# Altium PCB soldering_analog.PcbDoc
Units mm, origin at the board's own origin, x right, y up, seen from the top; angles counter-clockwise.
Board outline 80.5 x 20 mm, 2 copper layers (Top Layer, Bottom Layer), stack 1.571 mm thick; 36 components, 23 nets, 91 pads, 0 vias.
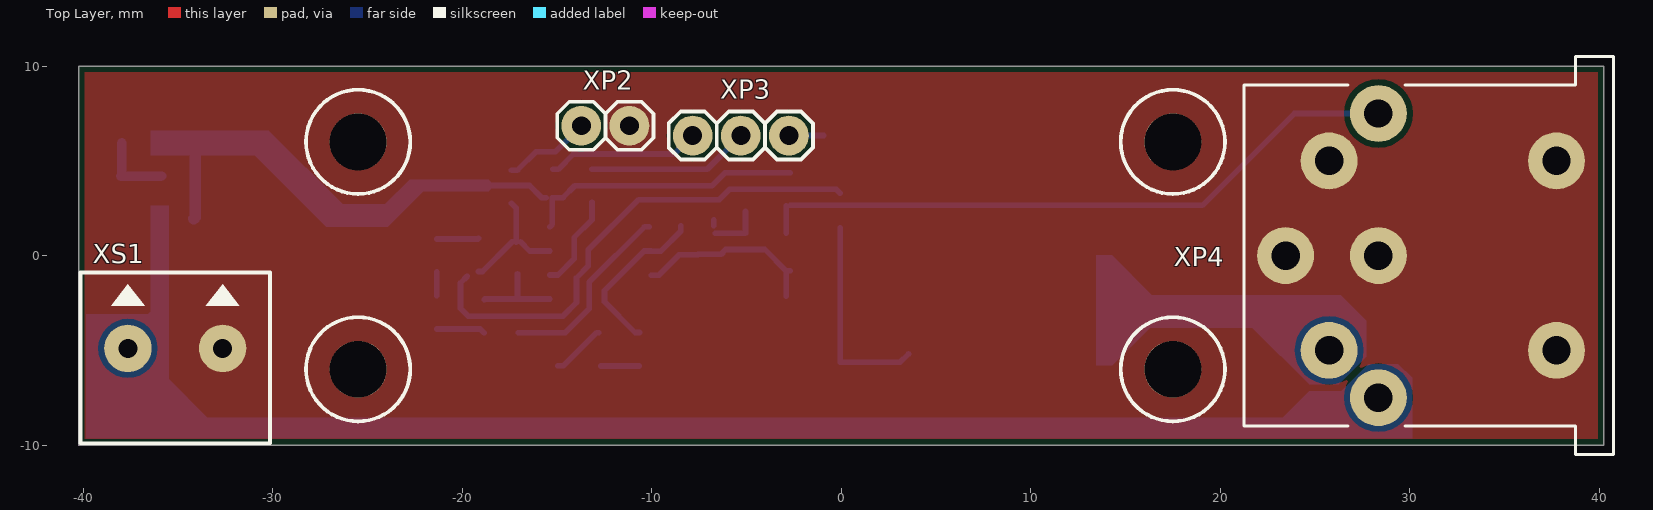
[diagram p0: Top Layer view]
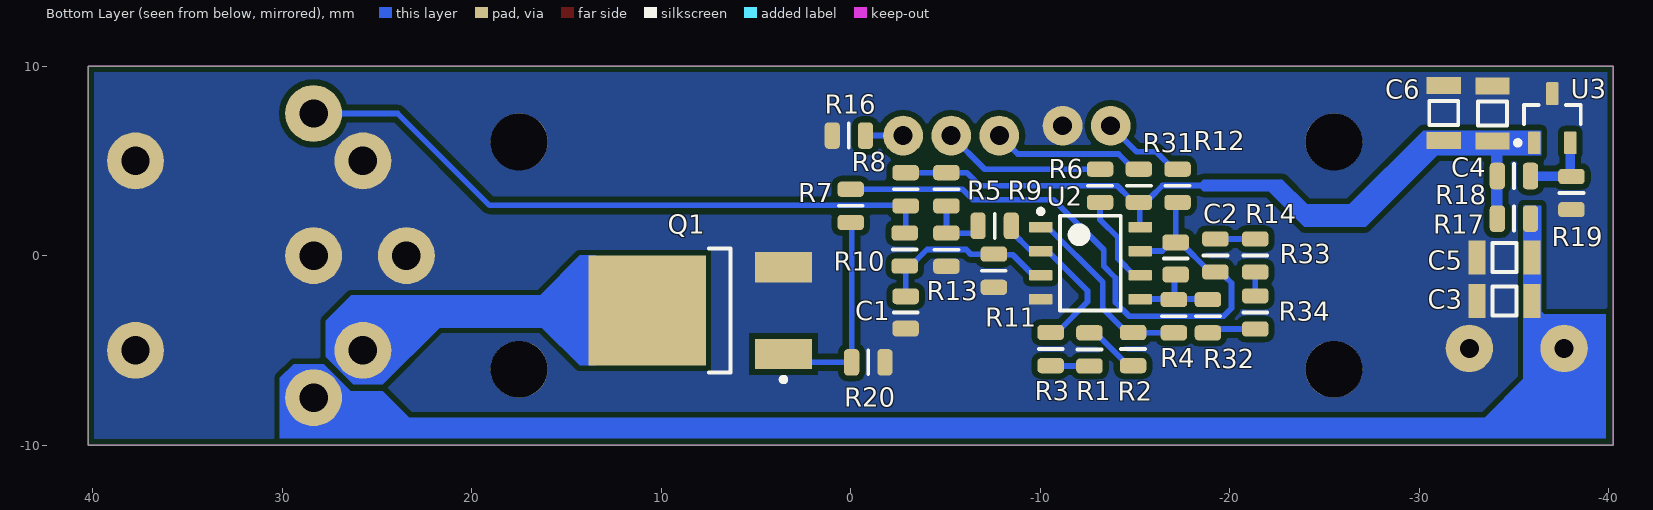
[diagram p1: Bottom Layer view, seen from below]

## Layer stack, top to bottom
Top Solder: solder mask 0.0102, Solder Resist, Dk 3.5
Top Layer: signal copper 0.0356
Dielectric 1: dielectric 1.5, FR-4, Dk 4.8
Bottom Layer: signal copper 0.0356
Bottom Solder: solder mask 0.0102, Solder Resist, Dk 3.5

## Board outline
-40.25,-10 40.25,-10 40.25,10 -40.25,10

## Design rules (kind name [scope] priority, off if disabled: settings)
Clearance Clearance_1 [IsRegion] p1: gap=0.3 ignorepadtopadclearanceinfootprint=FALSE
Clearance [All] p2: gap=0.25 ignorepadtopadclearanceinfootprint=FALSE
HoleSize [All] p1: absolutevalues=TRUE maxlimit=3 minlimit=0.2 maxpercent=80.000 minpercent=20.000
MinimumSolderMaskSliver [All] p1: minsoldermaskwidth=0.2
PolygonConnect PolygonConnect_1 [IsVia] p1: connectstyle=Direct reliefconductorwidth=0.254 reliefentries=4 polygonreliefangle="90 Angle" airgapwidth=0.254
PolygonConnect [All] p2: connectstyle=Direct reliefconductorwidth=0.35 reliefentries=4 polygonreliefangle="90 Angle" airgapwidth=0.25
RoutingVias [All] p1: holewidth=0.711 width=1.27 viastyle="Through Hole" minholewidth=0.711 minwidth=1.27 maxholewidth=0.711 maxwidth=1.27
SilkToSilkClearance [All] p1: silktosilkclearance=0.1
SilkToSolderMaskClearance [IsPad] p1: minsilkscreentomaskgap=0.2 clearancetoexposedcopper=TRUE
SolderMaskExpansion [All] p1: expansion=0.102
Width [All] p1: maxlimit=2 minlimit=0.3 preferedwidth=0.3
26 further rules are at their usual default settings.

## Components (designator, comment, footprint, x,y, rotation, side; value= is the part's Value field where it differs from the comment)
C1 "100nF" CAP0805R -2.9,-3 r90 bottom
C2 "100nF" CAP0805R -17.15,-0.15 r270 bottom
C3 "10uF" CAP1206R -34.5,-2.4 r180 bottom
C4 "10uF" CAP1206R -33.873,7.5 r270 bottom
C5 "10uF" CAP1206R -34.5,-0.1 r180 bottom
C6 "10uF" CAP1206R -31.3,7.529 r270 bottom
Q1 "STD24N06LT4G" ONSC-DPAK-3-369C-01_V 7.95,-2.9 r0 bottom
R1 "10k" RES0805R -12.6,-4.95 r270 bottom
R2 "10k" RES0805R -14.9,-4.936 r270 bottom
R3 "10k" RES0805R -10.553,-4.936 r270 bottom
R4 "100k" RES0805R -17.05,-3.2 r270 bottom
R5 "1k" RES0805R -5.05,3.5 r90 bottom
R6 "100k" RES0805R -13.16,3.685 r270 bottom
R7 "51" RES0805R 0,2.625 r90 bottom
R8 "1k" RES0805R -2.9,3.5 r90 bottom
R9 "10k" RES0805R -7.6,1.568 r0 bottom
R10 "10k" RES0805R -2.85,0.319 r90 bottom
R11 "100k" RES0805R -7.55,-0.8 r90 bottom
R12 "51" RES0805R -17.25,3.685 r270 bottom
R13 "51" RES0805R -5.05,0.312 r90 bottom
R14 "1M" RES0805R -19.25,0.001 r270 bottom
R16 "2k2" RES0805R 0.1,6.335 r180 bottom
R17 "510" RES0805R -35,1.95 r0 bottom
R18 "22k" RES0805R -35,4.2 r0 bottom
R19 "10k" RES0805R -38.04,3.3 r90 bottom
R20 "100k" RES0805R -0.925,-5.631 r0 bottom
R31 "6k2" RES0805R -15.21,3.685 r270 bottom
R32 "1M" RES0805R -18.85,-3.2 r90 bottom
R33 "1M" RES0805R -21.35,0.004 r270 bottom
R34 "1M" RES0805R -21.35,-3 r270 bottom
U2 "LM358DR" D0008A_L -12.65,-0.4 r180 bottom
U3 "TL431AQDBZRQ1" DBZ0003A_M -37.03,7.25 r90 bottom
XP2 "PLS-02R" PLS-02R -12.45,6.853 r0 top
XP3 "PLS-03R" PLS-03R -5.3,6.335 r0 top
XP4 "KDJ01-6" KDJ01-6 40.75,0 r270 top
XS1 "306-021-12" 306-021-12 -35.15,-4.9 r180 top

## Footprints (in the part's own frame and the unit in brackets; to place one, negate y for a bottom-side part, rotate by r counter-clockwise, add the part's x,y. Pads: shape width x height; smd on the part's side, far side on the other; paste and mask are expansions set on the pad)
306-021-12 [mm]
  round 2.5 hole 1: 1(-2.5,0) 2(2.5,0)
  silkscreen extent -5,-4 5,5, body extent -5,-4 5,5, height 12.62
CAP0805R [mm] "capacitor 0805 reflow soldering"
  rrect50% 0.85x1.4 smd: 1(-0.85,0) 2(0.85,0)
  silkscreen extent 0,-0.64 0,0.64, body extent -1,-0.62 1,0.63, height 0.61
CAP1206R [mm] "capacitor 1206 reflow soldering"
  rect 0.9x1.8 smd: 1(-1.45,0) 2(1.45,0)
  silkscreen extent -0.64,-0.76 0.64,0.76, body extent -1.6,-0.8 1.6,0.8, height 0.79
D0008A_L [mm] "SOIC, 8-Leads, Body 5x4mm, Pitch 1.27mm, IPC High Density"
  rrect18% 1.25x0.55 smd: 1(-2.625,1.905) 2(-2.625,0.635) 3(-2.625,-0.635) 4(-2.625,-1.905) 5(2.625,-1.905) 6(2.625,-0.635) 7(2.625,0.635) 8(2.625,1.905)
  silkscreen extent -2.75,-2.5 1.6,2.85, body extent -3,-2.45 3,2.45, height 1.63
DBZ0003A_M [mm] "SOT23, 3-Leads, Body 3.04x1.4mm, Pitch 0.95mm, IPC Low Density"
  rrect15% 1.2x0.65 smd: 1(-1.3,0.95) 2(-1.3,-0.95) 3(1.3,0)
  silkscreen extent -1.42,-1.5 0.7,1.95, body extent -1.26,-1.46 1.26,1.46, height 0.96
KDJ01-6 [mm]
  round 3 hole 1.5: 1(-7.5,-12.4) 2(-5,-15) 3(0,-17.3) 4(5,-15) 5(7.5,-12.4) 6(0,-12.4) 7(-5,-3) 8(5,-3)
  silkscreen extent -10.5,-19.5 10.5,0, body extent -10.5,-19.5 10.5,0, height 19.51
ONSC-DPAK-3-369C-01_V [mm] "DPAK, 3-Leads, Body 6.54x6.095mm, Pitch 2.29mm"
  rect 3x1.6 smd: 1(-4.4,2.29) 3(-4.4,-2.29)
  rect 6.2x5.8 smd: 4(2.8,0)
  silkscreen extent -4.52,-3.27 -0.45,3.76, body extent -1.6,-3.27 4.49,3.27, height 2.38
PLS-02R [mm]
  round 2.1 hole 1: 1(-1.27,0) 2(1.27,0)
  silkscreen extent -2.54,-1.27 2.54,1.27, body extent -2.54,-7.35 2.54,1.27, height 5.46
PLS-03R [mm]
  round 2.1 hole 1: 1(-2.54,0) 2(0,0) 3(2.54,0)
  silkscreen extent -3.81,-1.27 3.81,1.27, body extent -3.81,-7.35 3.81,1.27, height 5.46
RES0805R [mm] "resistor 0805 reflow soldering"
  rrect50% 0.8x1.4 smd: 1(-0.875,0) 2(0.875,0)
  silkscreen extent 0,-0.64 0,0.64, body extent -1,-0.62 1,0.63, height 0.61

## Part data
C1 C2: library part CC0805_100NF_50V_10%_X7R, Case=0805, Manufacturer=GENERIC, Manufacturer1 ComponentHeight=1.35mm, Manufacturer1 Example=EPCOS, Manufacturer1 Part Number=B37941K5104K62, Manufacturer Part Number 2=CC0805KPX7R9BB104, Tolerance=±10%, Voltage=50V, Author="I. Kuznetsov", Component Type=Standard, CreateDate=03.12.2007, HelpURL=\\cern.ch\dfs\Applications\Altium\Datasheets\CC0805_X7R_EPCOS.pdf, LatestRevisionDate=03.12.2007, Manufacturer Part Number=CC0805_100NF_50V_10%_X7R, Mounted=Yes, Part Description="SMD Multilayer Chip Ceramic Capacitor", Part Number=CC0805_100NF_50V_10%_X7R, Pin Count=2, SMD=Yes, Socket=No, Status=Preferred, Table="Capacitors SMD", TC=X7R
C3 C4 C5 C6: library part CC1206_10UF_25V_10%_X7R, Case=1206, Manufacturer=GENERIC, Manufacturer1 ComponentHeight=1.8mm, Manufacturer1 Example=KEMET, Manufacturer1 Part Number=C1206C106K4RACTU, Manufacturer Part Number=CC1206_10uF_25V_10%_X7R, Manufacturer Part Number 2=CC1206KKX7R8BB106, Tolerance=±10%, Voltage=25V, Author="I. Kuznetsov", Component Type=Standard, CreateDate=12.09.2012, HelpURL=\\cern.ch\dfs\Applications\Altium\Datasheets\CC1206_X7R_KEMET.pdf, LatestRevisionDate=12.09.2012, Mounted=Yes, Part Description="SMD Multilayer Chip Ceramic Capacitor", Part Number=CC1206_10UF_25V_10%_X7R, Pin Count=2, SMD=Yes, Socket=No, Status=Preferred, Table="Capacitors SMD", TC=X7R
Q1: library part CMP-1058-00416-1, "Power MOSFET, 24 A, 60 V, Logic Level, N-Channel, 3-Pin DPAK, Pb-Free, Tape and Reel", Manufacturer="On Semiconductor", Package Type=DPAK-3, Channel Polarity="N Channel", Ciss Typ (pF)=814, ComponentLink1Description="Manufacturer URL", ComponentLink1URL=http://www.onsemi.com/, ComponentLink2Description=Datasheet, ComponentLink2URL=http://www.onsemi.cn/pub_link/Collateral/NTD24N06L-D.PDF, ComponentLink3Description="Package Specification", ComponentLink3URL=http://www.onsemi.cn/pub_link/Collateral/369C.PDF, Configuration=Single, Coss Typ (pF)=258, Crss Typ (pF)=80, DatasheetVersion="Rev. 3", Mounting Technology="Surface Mount", PackageDescription="3-Pin Flange Mount, Body 6.54 x 6.095 mm, Pitch 2.29 mm", PackageReference=DPAK-3-369C-01, PackageVersion="Rev. E, 02/2014", Packing="Tape and Reel", PartNumber=STD24N06LT4G, Qrr Typ (nC)=84, RoHS=Pb-Free, V(BR)DSS Min (V)=60, VGS(th) Max (V)=2
R1 R2 R3 R9 R10 R19: library part R0805_10K_1%_0.125W_100PPM, Case=0805, Manufacturer=GENERIC, Manufacturer1 ComponentHeight=0.6mm, Manufacturer1 Example="NIC COMPONENT", Manufacturer1 Part Number=NRC10F1002TRF, Power=0.125W, Tolerance=±1%, Author="CERN DEM JLC", Component Type=Standard, CreateDate=03.12.2007, HelpURL=\\cern.ch\dfs\Applications\Altium\Datasheets\R0805_NIC_NRC.pdf, LatestRevisionDate=13.03.2008, Manufacturer Part Number=R0805_10K_1%_0.125W_100PPM, Mounted=Yes, PackageDescription=Standard, Part Description="General Purpose Thick Film Chip Resistor", Part Number=R0805_10K_1%_0.125W_100PPM, Pin Count=2, SMD=Yes, Socket=No, Status=Preferred, Table="Resistors SMD", TC=±100ppm/°C
R4 R6 R11 R20: library part R0805_100K_1%_0.125W_100PPM, Case=0805, Manufacturer=GENERIC, Manufacturer1 ComponentHeight=0.6mm, Manufacturer1 Example="NIC COMPONENT", Manufacturer1 Part Number=NRC10F1003TRF, Power=0.125W, Tolerance=±1%, Author="CERN DEM JLC", Component Type=Standard, CreateDate=03.12.2007, HelpURL=\\cern.ch\dfs\Applications\Altium\Datasheets\R0805_NIC_NRC.pdf, LatestRevisionDate=13.03.2008, Manufacturer Part Number=R0805_100K_1%_0.125W_100PPM, Mounted=Yes, Part Description="General Purpose Thick Film Chip Resistor", Part Number=R0805_100K_1%_0.125W_100PPM, Pin Count=2, SMD=Yes, Socket=No, Status=Preferred, Table="Resistors SMD", TC=±100ppm/°C
  R4 R6 R11: PackageDescription=Standard
R5 R8: library part R0805_1K_1%_0.125W_100PPM, Case=0805, Manufacturer=GENERIC, Manufacturer1 ComponentHeight=0.6mm, Manufacturer1 Example="NIC COMPONENT", Manufacturer1 Part Number=NRC10F1001TRF, Power=0.125W, Tolerance=±1%, Author="CERN DEM JLC", Component Type=Standard, CreateDate=03.12.2007, HelpURL=\\cern.ch\dfs\Applications\Altium\Datasheets\R0805_NIC_NRC.pdf, LatestRevisionDate=13.03.2008, Manufacturer Part Number=R0805_1K_1%_0.125W_100PPM, Mounted=Yes, PackageDescription=Standard, Part Description="General Purpose Thick Film Chip Resistor", Part Number=R0805_1K_1%_0.125W_100PPM, Pin Count=2, SMD=Yes, Socket=No, Status=Preferred, Table="Resistors SMD", TC=±100ppm/°C
R7 R12 R13: library part R0805_51R_1%_0.125W_100PPM, Case=0805, Manufacturer=GENERIC, Manufacturer1 ComponentHeight=0.6mm, Manufacturer1 Example="NIC COMPONENT", Manufacturer1 Part Number=NRC10F51R0TRF, Power=0.125W, Tolerance=±1%, Author="CERN DEM JLC", Component Type=Standard, CreateDate=03.12.2007, HelpURL=\\cern.ch\dfs\Applications\Altium\Datasheets\R0805_NIC_NRC.pdf, LatestRevisionDate=13.03.2008, Manufacturer Part Number=R0805_51R_1%_0.125W_100PPM, Mounted=Yes, Part Description="General Purpose Thick Film Chip Resistor", Part Number=R0805_51R_1%_0.125W_100PPM, Pin Count=2, SMD=Yes, Socket=No, Status=Preferred, Table="Resistors SMD", TC=±100ppm/°C
  R13: PackageDescription=Standard
R14 R32 R33 R34: library part R0805_1M_1%_0.125W_100PPM, Case=0805, Manufacturer=GENERIC, Manufacturer1 ComponentHeight=0.6mm, Manufacturer1 Example="NIC COMPONENT", Manufacturer1 Part Number=NRC10F1004TRF, Power=0.125W, Tolerance=±1%, Author="CERN DEM JLC", Component Type=Standard, CreateDate=03.12.2007, HelpURL=\\cern.ch\dfs\Applications\Altium\Datasheets\R0805_NIC_NRC.pdf, LatestRevisionDate=13.03.2008, Manufacturer Part Number=R0805_1M_1%_0.125W_100PPM, Mounted=Yes, PackageDescription=Standard, Part Description="General Purpose Thick Film Chip Resistor", Part Number=R0805_1M_1%_0.125W_100PPM, Pin Count=2, SMD=Yes, Socket=No, Status=Preferred, Table="Resistors SMD", TC=±100ppm/°C
R16: library part R0805_2K2_1%_0.125W_100PPM, Case=0805, Manufacturer=GENERIC, Manufacturer1 ComponentHeight=0.6mm, Manufacturer1 Example="NIC COMPONENT", Manufacturer1 Part Number=NRC10F2201TRF, Power=0.125W, Tolerance=±1%, Author="CERN DEM JLC", Component Type=Standard, CreateDate=03.12.2007, HelpURL=\\cern.ch\dfs\Applications\Altium\Datasheets\R0805_NIC_NRC.pdf, LatestRevisionDate=13.03.2008, Manufacturer Part Number=R0805_2K2_1%_0.125W_100PPM, Mounted=Yes, PackageDescription=Standard, Part Description="General Purpose Thick Film Chip Resistor", Part Number=R0805_2K2_1%_0.125W_100PPM, Pin Count=2, SMD=Yes, Socket=No, Status=Preferred, Table="Resistors SMD", TC=±100ppm/°C
R17: library part R0805_510R_1%_0.125W_100PPM, Case=0805, Manufacturer=GENERIC, Manufacturer1 ComponentHeight=0.6mm, Manufacturer1 Example="NIC COMPONENT", Manufacturer1 Part Number=NRC10F5100TRF, Power=0.125W, Tolerance=±1%, Author="CERN DEM JLC", Component Type=Standard, CreateDate=03.12.2007, HelpURL=\\cern.ch\dfs\Applications\Altium\Datasheets\R0805_NIC_NRC.pdf, LatestRevisionDate=13.03.2008, Manufacturer Part Number=R0805_510R_1%_0.125W_100PPM, Mounted=Yes, PackageDescription=Standard, Part Description="General Purpose Thick Film Chip Resistor", Part Number=R0805_510R_1%_0.125W_100PPM, Pin Count=2, SMD=Yes, Socket=No, Status=Preferred, Table="Resistors SMD", TC=±100ppm/°C
R18: library part R0805_22K_1%_0.125W_100PPM, Case=0805, Manufacturer=GENERIC, Manufacturer1 ComponentHeight=0.6mm, Manufacturer1 Example="NIC COMPONENT", Manufacturer1 Part Number=NRC10F2202TRF, Power=0.125W, Tolerance=±1%, Author="CERN DEM JLC", Component Type=Standard, CreateDate=03.12.2007, HelpURL=\\cern.ch\dfs\Applications\Altium\Datasheets\R0805_NIC_NRC.pdf, LatestRevisionDate=13.03.2008, Manufacturer Part Number=R0805_22K_1%_0.125W_100PPM, Mounted=Yes, PackageDescription=Standard, Part Description="General Purpose Thick Film Chip Resistor", Part Number=R0805_22K_1%_0.125W_100PPM, Pin Count=2, SMD=Yes, Socket=No, Status=Preferred, Table="Resistors SMD", TC=±100ppm/°C
R31: library part R0805_6K2_1%_0.125W_100PPM, Case=0805, Manufacturer=GENERIC, Manufacturer1 ComponentHeight=0.6mm, Manufacturer1 Example="NIC COMPONENT", Manufacturer1 Part Number=NRC10F6201TRF, Power=0.125W, Tolerance=±1%, Author="CERN DEM JLC", Component Type=Standard, CreateDate=03.12.2007, HelpURL=\\cern.ch\dfs\Applications\Altium\Datasheets\R0805_NIC_NRC.pdf, LatestRevisionDate=13.03.2008, Manufacturer Part Number=R0805_6K2_1%_0.125W_100PPM, Mounted=Yes, PackageDescription=Standard, Part Description="General Purpose Thick Film Chip Resistor", Part Number=R0805_6K2_1%_0.125W_100PPM, Pin Count=2, SMD=Yes, Socket=No, Status=Preferred, Table="Resistors SMD", TC=±100ppm/°C
U2: library part CMP-1685-00009-1, "Dual Operational Amplifier, 3 to 32 V, 0 to 70 degC, 8-Pin SOIC (D), Green (RoHS & no Sb/Br), Tape and Reel", Code_JEDEC=MS-012, ComponentLink1Description="Manufacturer URL", ComponentLink1URL=http://www.ti.com/, ComponentLink2Description=Datasheet, ComponentLink2URL=http://www.ti.com/lit/ds/symlink/lm358.pdf, ComponentLink3Description="Package Specification", ComponentLink3URL=http://www.ti.com/lit/ml/msoi002j/msoi002j.pdf, DatasheetVersion="SLOS068T, 04/2015", PackageDescription="8-Pin Small Outline Integrated Circuit, Body 4.9 x 3.9 mm, Pitch 1.27 mm", PackageReference=D0008A, PackageVersion="4040047-3/M, 06/2011"
U3: library part CMP-0366-01226-2, "Automotive Catalog Adjustable Precision Shunt Regulator, 34 ppm / degC, 100 mA, -40 to 125 degC, 3-pin SOT-23 (DBZ), Green (RoHS & no Sb/Br)", Manufacturer="Texas Instruments", Rating=Automotive, Temp Coeff(Typ)(ppm/ degree C)=34, Code_JEDEC=TO-236, ComponentLink1Description="Manufacturer URL", ComponentLink1URL=http://www.ti.com/, ComponentLink2Description=Datasheet, ComponentLink2URL=http://www.ti.com/general/docs/lit/getliterature.tsp?genericPartNumber=TL431A-Q1&fileType=pdf, ComponentLink3Description="Package Specification", ComponentLink3URL=http://www.ti.com/litv/pdf/mpds108a, DatasheetVersion=SGLS302C, Eco-Plan="Green (RoHS & no Sb/Br)", Initial Accuracy @ 25/deg C(%)=1, Iout/Iz(Max)(mA)=100, Min Iz for Regulation(uA)=600, Mounting Technology="Surface Mount", PackageDescription="3-Pin Plastic Small Outline, Body 2.92 x 1.3 mm, Pitch 0.95 mm", PackageReference=DBZ0003A, PackageVersion=4203227/B, PartNumber=TL431AQDBZRQ1, SubFamily="Shunt Voltage Reference", VO Adj(Max)(V)=36, VO Adj(Min)(V)=2.495
XP2: ComponentLink1URL=http://lib.chipdip.ru/227/DOC000227157.pdf, Part Number=PLS-02R, Table=AUK
XP3: ComponentLink1URL=http://lib.chipdip.ru/227/DOC000227157.pdf, Part Number=PLS-03R, Table=AUK
XP4: Device=KDJ01-6, Family=KDJ01-6, Part Number=KDJ01-6, Table=OTHER
XS1: ComponentLink1URL=http://www.promelec.ru/pdf/305,306.pdf, Component Type=Standard, Device=306-021-12, Family=DG306, Part Number=306-021-12, Pin Count=2, Table=DEGSON

## Free pads (board coordinates)
  round 3 hole 3: 0(-25.5,-6) 0(-25.5,6) 0(17.5,-6) 0(17.5,6)

## Nets (pads, with @x,y where several pads share a name; then routed paths per layer and width w, separated by ;. In a path a pad name is that pad's centre, name@x,y a point inside that pad or via, vN(x,y) a via of type N, cw(c..) or ccw(c..) an arc to the next point about the centre after c; other vN are vias at no path point)
+24V: C3.2 C5.2 R17.1 XP4.5 XS1.2
GND: C1.1 C3.1 C4.1 C5.1 C6.1 pad.0 Q1.3 R11.1 R13.1 R16.1 R19.1 R20.1 U2.4 U3.3 XP2.2 XP4.2 XP4.3 XP4.6 XP4.7 XP4.8 XS1.1
HEATER: C2.1 R7.2 R12.2 R14.2 U2.7 | length 32.5
  Bottom Layer w0.3: R14.2@-19.737,-1.087 -20.1,-1.45 -20.1,-2.782 -19.682,-3.2 -14.7,-3.2 -13.975,-2.475 -13.975,-1.175 -13.35,-0.55 -13.35,0.304 -10.704,2.95 -6.445,2.95 -5.895,3.5 -0.27,3.5 R7.2@-0.06,3.29 ; R14.2@-19.15,-0.836 -18.935,-0.836 C2.1@-17.365,0.734 ; R12.2@-17.4,2.76 -17.15,2.51 C2.1 ; C2.1@-16.934,0.734 -16.447,0.247 U2.7@-15.385,0.247
IRON_PTC: R8.1 R10.2 XP4.1 | length 34.5
  Bottom Layer w0.3: R10.2@-2.9,1.194 R8.1 ; R8.1@-2.7,2.65 19.065,2.65 23.915,7.5 XP4.1
IRON_PWR: Q1.4 XP4.4
NetC1_2: C1.2 R10.1 R11.2 U2.3 | length 9.7
  Bottom Layer w0.3: U2.3 -9.635,-1.035 -8.554,0.046 -7.579,0.046 R11.2 -6.338,0.075 -6.095,0.319 -4.033,0.319 -2.914,-0.8 R10.1@-2.7,-0.8 ; C1.2 R10.1@-2.9,-0.829
NetC2_2: C2.2 R4.1 R32.2 U2.5 | length 4.8
  Bottom Layer w0.3: R32.2 -18.818,-2.293 R4.1@-17.05,-2.293 ; C2.2@-17.085,-0.966 -17.085,-2.258 R4.1@-17.05,-2.293 ; U2.5@-15.385,-2.293 R4.1@-17.05,-2.293
NetQ1_1: Q1.1 R7.1 R20.2 | length 10.9
  Bottom Layer w0.3: R7.1@-0.05,1.475 R20.2 3.109,-5.631 Q1.1
NetR1_1: R1.1 R2.2 | length 2.9
  Bottom Layer w0.3: R2.2@-14.959,-5.811 -14.659,-5.811 -12.923,-4.075 R1.1@-12.8,-4.075
NetR1_2: R1.2 R3.2 | length 2
  Bottom Layer w0.3: R1.2@-12.7,-5.825 R3.2@-10.664,-5.825
NetR2_1: R2.1 R4.2 U2.1 | length 10.1
  Bottom Layer w0.3: R4.2 -14.575,-4.075 -13.3,-2.8 -13.3,-1.401 -10.382,1.517 U2.1@-10.135,1.517
NetR3_1: R3.1 R9.1 U2.2 | length 8.7
  Bottom Layer w0.3: R3.1@-10.65,-4.061 -10.879,-4.061 -12.5,-2.44 -12.5,-1.852 -10.402,0.247 U2.2@-10.025,0.247 ; U2.2 -9.52,0.235 -8.475,1.28 R9.1
NetR5_1: R5.1 R9.2 R13.2 | length 3
  Bottom Layer w0.3: R9.2 R9.2@-6.725,1.875 ; R9.2@-6.65,1.187 R13.2 R5.1@-5.05,2.325
NetR6_1: R6.1 XP3.2 | length 8.6
  Bottom Layer w0.3: R6.1 -7.075,4.56 XP3.2
NetR6_2: R6.2 U2.6 | length 5
  Bottom Layer w0.3: U2.6@-15.385,-1.023 -14.959,-1.023 -14.1,-0.164 -14.1,0.955 -13.16,1.895 R6.2
NetR12_1: R12.1 XP2.1 | length 4.7
  Bottom Layer w0.3: R12.1@-17.4,4.51 -17.09,4.51 -16.126,5.474 -15.098,5.474 XP2.1
NetR14_1: R14.1 R33.1 | length 2.2
  Bottom Layer w0.3: R33.1 -19.184,0.879 R14.1@-19.15,0.914
NetR16_2: R16.2 XP3.3 | length 1.8
  Bottom Layer w0.3: XP3.3 R16.2@-0.925,6.335
NetR18_1: R18.1 R19.2 U3.2 | length 4
  Bottom Layer w0.5: U3.2 -37.98,4.235 R19.2 -35.9,4.175 R18.1
NetR31_1: R31.1 XP3.1 | length 8.1
  Bottom Layer w0.3: R31.1 -14.932,4.56 -14.128,5.364 -8.811,5.364 XP3.1
NetR32_1: R32.1 R34.2 | length 2.6
  Bottom Layer w0.3: R34.2 -19.05,-3.875 R32.1
NetR33_2: R33.2 R34.1 | length 1.3
  Bottom Layer w0.3: R34.1 R33.2
VDD: C4.2 C6.2 R5.2 R8.2 R17.2 R18.2 R31.2 U2.8 U3.1 | length 24.4
  Bottom Layer w0.3: -18.49,3.7 -16.45,3.7 -15.807,3.057 R31.2@-15.585,3.057 ; U2.8@-15.385,1.517 -15.26,1.642 -15.26,3.06 -14.689,3.06 -14.064,3.685 -6.829,3.685 -6.138,4.375 R5.2 R8.2 R8.2@-2.7,4.375
  Bottom Layer w0.6: U3.1 -35.98,6.05 C4.2@-34.1,6.05 ; R17.2@-34.175,1.949 -34.1,2.024 C4.2@-34.1,5.975 ; C4.2@-34.125,5.95 C4.2@-34.1,5.975 ; C4.2@-34.014,6.061 C4.2@-34.025,6.05 ; C4.2 C4.2@-34.025,6.05 ; C4.2@-34.1,5.975 C4.2@-34.1,6.05 ; C4.2@-34.1,5.975 C4.2@-34.025,6.05 ; C4.2@-34.1,6.05 C4.2@-34.025,6.05

## Polygon pours and split planes (outlines as drawn)
GND on Bottom Layer "Bottom Layer-GND" (solid, remove dead copper, pour order 4): -40.25,10 -40.25,-10 40.25,-10 40.25,10
GND on Top Layer "Bottom Layer-GND" (solid, remove dead copper, pour order 2): -40.25,10 -40.25,-10 40.25,-10 40.25,10

## Keep-outs
Keep-Out Layer:
  the board outline again, w0.05

## Other copper
Bottom Layer:
  region net VDD: -36.435,5.3 -30.965,5.3 -27.182,1.517 -23.933,1.517 -22.065,3.385 -18.615,3.385 -18.3,3.7 -18.615,4.015 -22.785,4.015 -24.1,2.7 -26.315,2.7 -30.215,6.6 -36.435,6.6
  region net +24V: 24.7,-7.15 23.3,-8.55 -33.45,-8.55 -35.5,-6.5 -35.5,2.633 -36.435,2.633 -36.435,-2.935 -36.6,-3.1 -39.85,-3.1 -39.85,-9.65 18.25,-9.65 30.124,-9.65 30.124,-6.457 29.397,-5.729 27.81,-5.729 26.389,-7.15
  region net IRON_PWR: 27.7,-3.45 27.7,-5.35 26.258,-6.792 24.692,-6.792 21.7,-3.8 16.303,-3.8 14.303,-5.8 13.45,-5.8 13.45,0.006 14.294,0.006 16.4,-2.1 26.35,-2.1

## Silkscreen, mask and mechanical layers (free items; w line width, h text height)
Top Overlay:
  circle w0.2: c17.5,6 r2.75
  circle w0.2: c-25.5,-6 r2.75
  circle w0.2: c-25.5,6 r2.75
  circle w0.2: c17.5,-6 r2.75